# Altium PCB print.PcbDoc
Units mil, origin at the board's own origin, x right, y up, seen from the top; angles counter-clockwise.
Board outline 6000 x 4000 mil, 2 copper layers (Top Layer, Bottom Layer); 191 components, 0 nets, 628 pads, 0 vias.
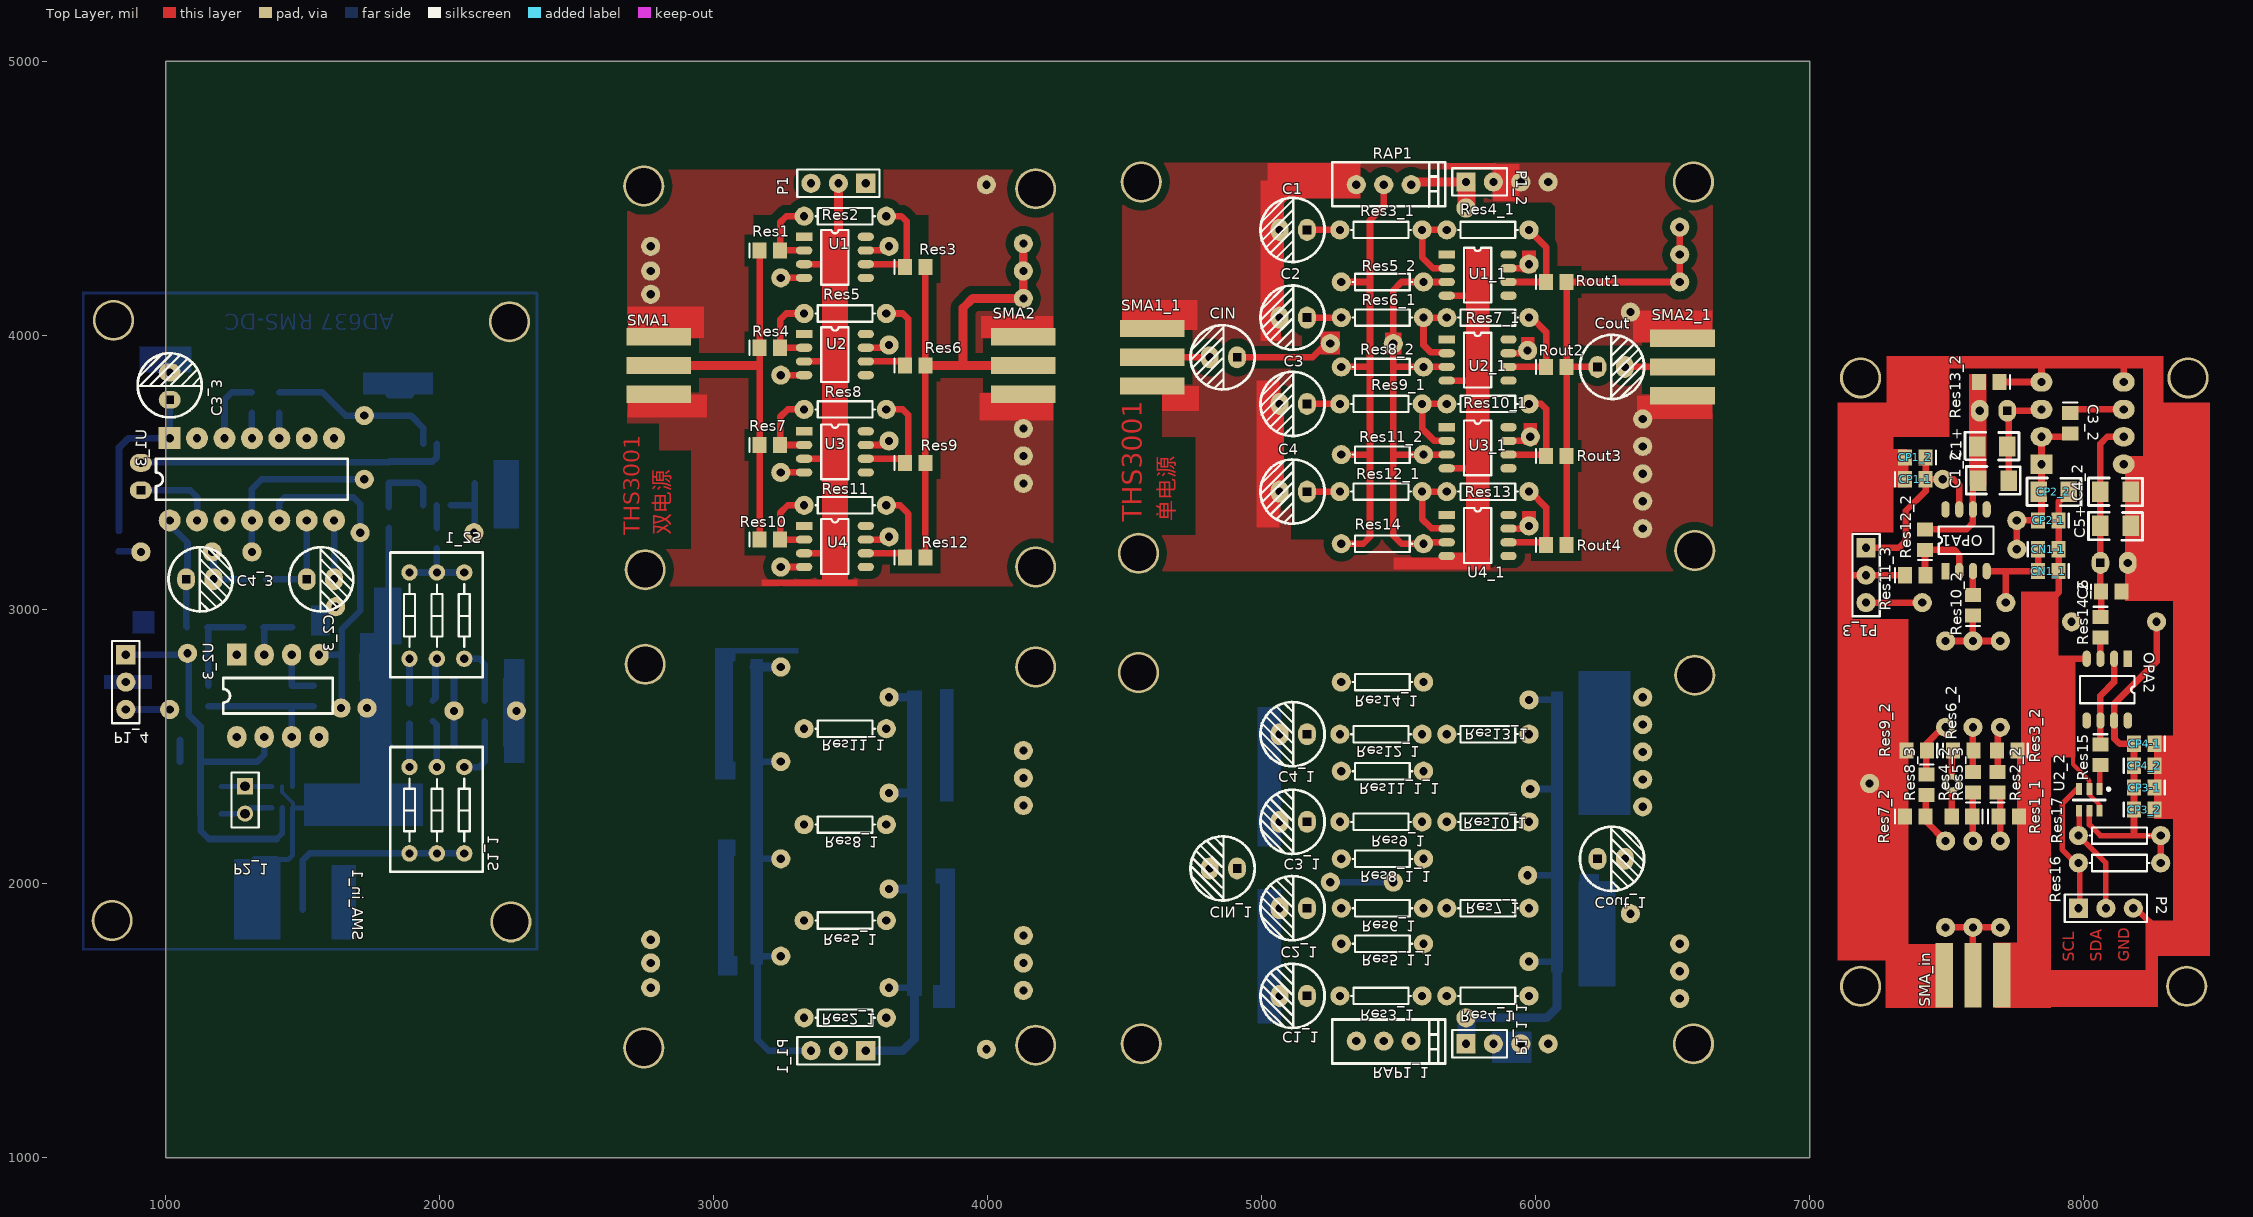
[diagram p0: Top Layer view]
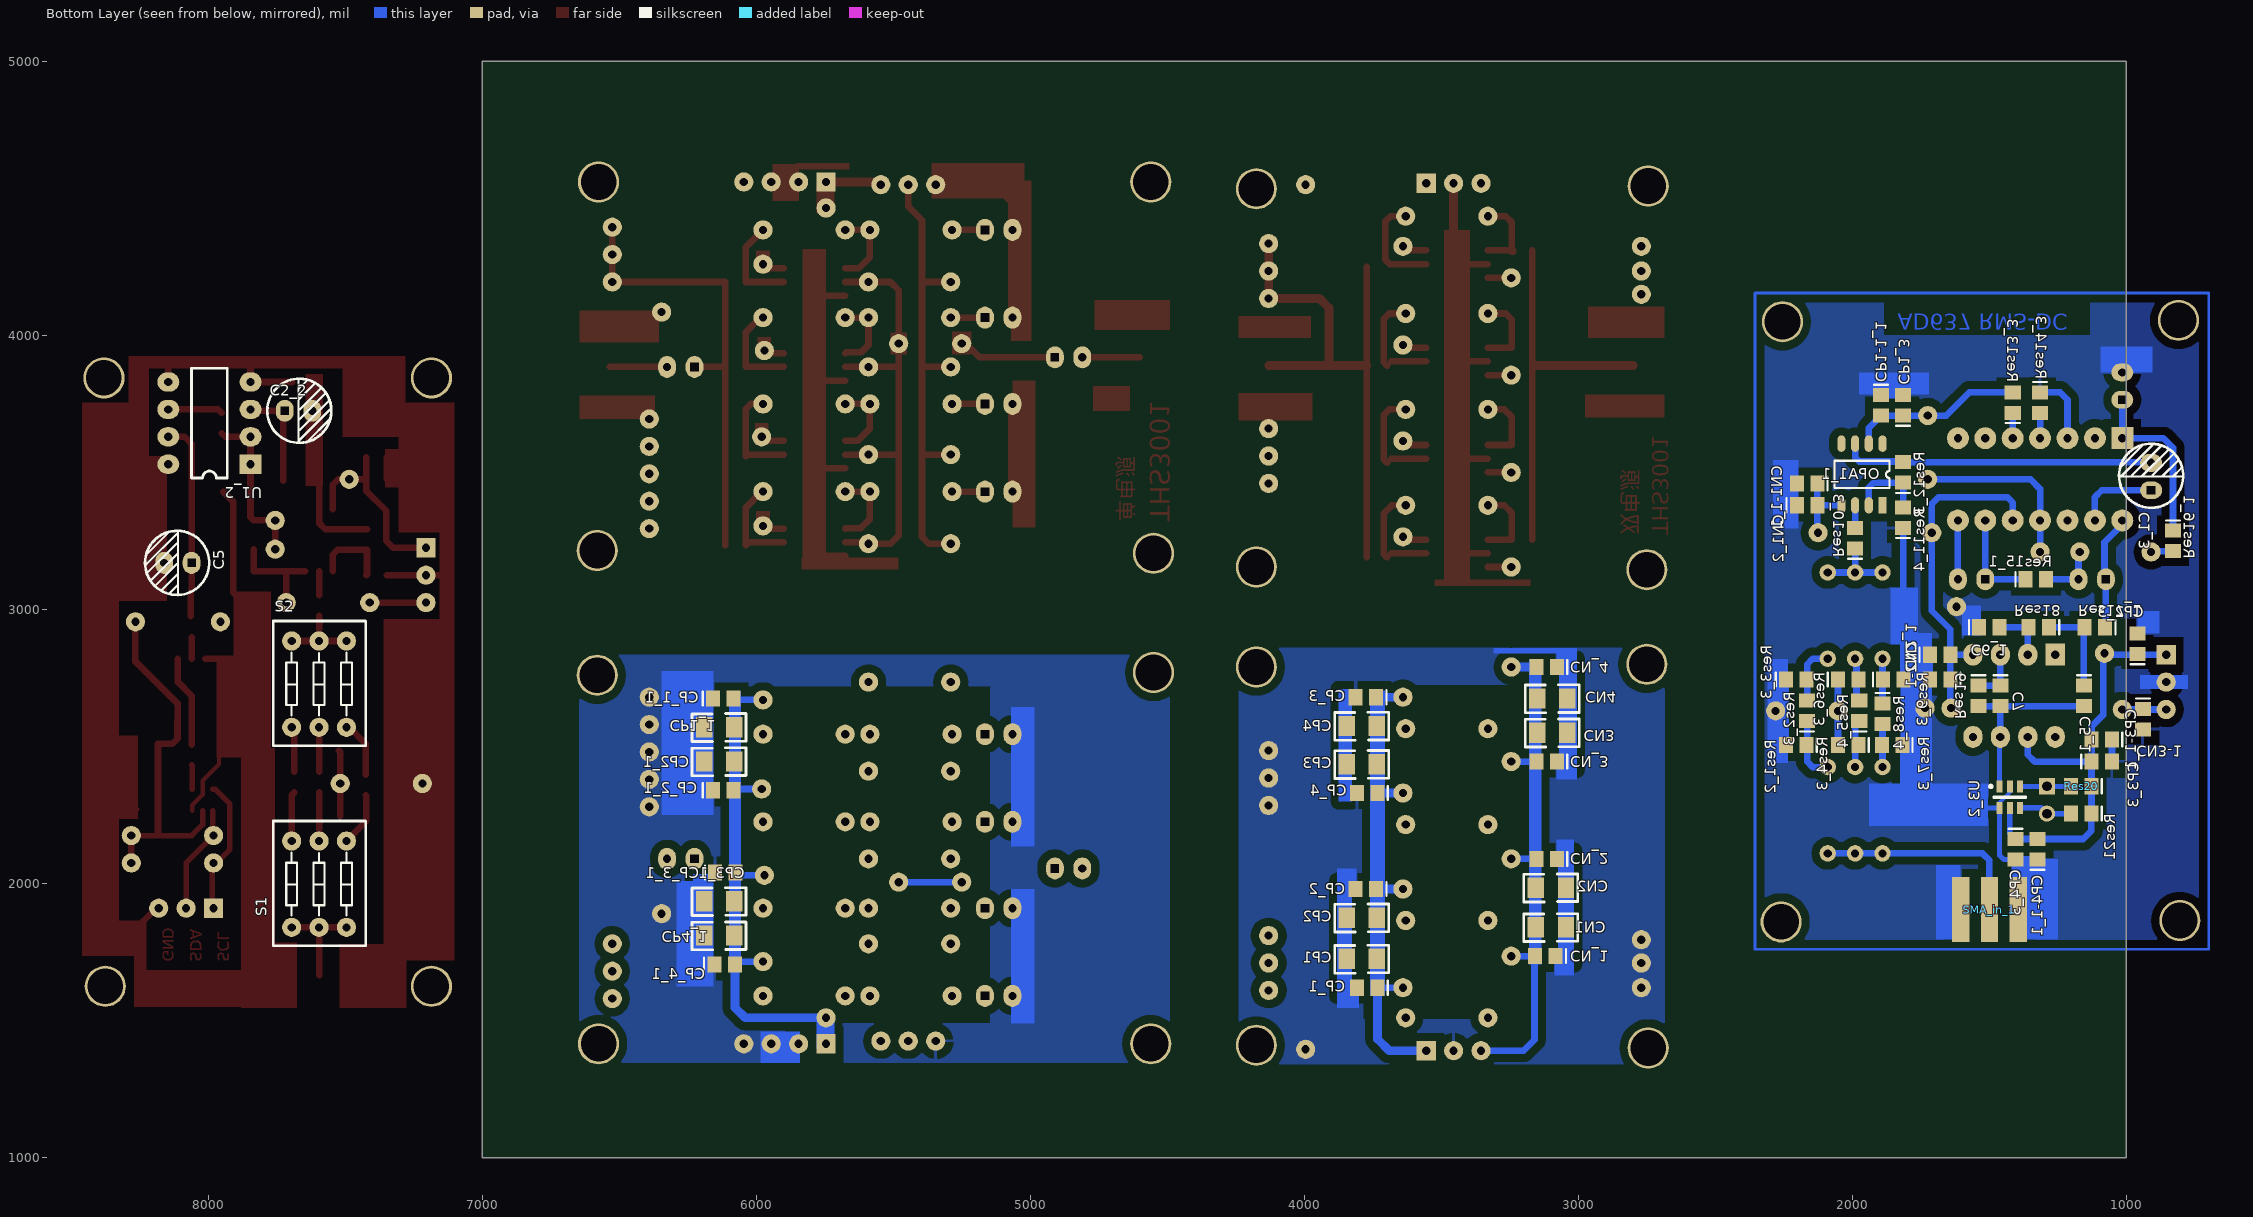
[diagram p1: Bottom Layer view, seen from below]

## Layer stack, top to bottom
Top Layer: signal copper 1.4
Dielectric: dielectric 12.6, FR-4, Dk 4.8
Bottom Layer: signal copper 1.4

## Board outline
1000,1000 7000,1000 7000,5000 1000,5000

## Design rules (kind name [scope] priority, off if disabled: settings)
Clearance [All] p1: gap=10
PolygonConnect [All] p1: connectstyle=Relief reliefconductorwidth=10 reliefentries=4 polygonreliefangle="90 Angle"
RoutingVias [All] p1: holewidth=28 width=50 viastyle="Through Hole" minholewidth=28 minwidth=50 maxholewidth=28 maxwidth=50
SilkscreenOverComponentPads [All] p1: minsilkscreentomaskgap=10
SolderMaskExpansion [All] p1: expansion=4
TestPointUsage [All] p1: valid=0 allowmultiple=FALSE
Testpoint [All] p1: side=15 testpointundercomponent=TRUE minsize=40 maxsize=100 preferedsize=60 minholesize=0 maxholesize=40 preferedholesize=32 testpointgrid=1 style=1023 order=0123456789
Width [All] p1: maxlimit=10 minlimit=10 preferedwidth=10
23 further rules are at their usual default settings.

## Components (designator, comment, footprint, x,y, rotation, side; value= is the part's Value field where it differs from the comment)
C1 "Cap Pol1" CAP1 5165,4385 r180 top
C1+ "Cap2" CAP_BTAN 7720,3595 r180 top
C1_1 "Cap Pol1" CAP1 5165,1590 r180 top (schematic designator C1)
C1_2 "Cap2" CAP_BTAN 7725,3470 r180 top (schematic designator C1)
C1_3 "Cap2" CAP1 910,3435 r90 bottom (schematic designator C1)
C2 "Cap Pol1" CAP1 5165,4065 r180 top
C2_1 "Cap Pol1" CAP1 5165,1910 r180 top (schematic designator C2)
C2_2 "Cap2" CAP1 7720,3725 r180 bottom (schematic designator C2)
C2_3 "Cap2" CAP1 1515,3110 r0 top (schematic designator C2)
C3 "Cap Pol1" CAP1 5165,3750 r180 top
C3_1 "Cap Pol1" CAP1 5165,2225 r180 top (schematic designator C3)
C3_2 "cap" C0805 7950,3680 r270 top (schematic designator C3)
C3_3 "Cap2" CAP1 1015,3765 r90 top (schematic designator C3)
C4 "Cap Pol1" CAP1 5165,3430 r180 top
C4_1 "Cap Pol1" CAP1 5165,2545 r180 top (schematic designator C4)
C4_2 "Cap2" CAP_BTAN 8060,3430 r0 top (schematic designator C4)
C4_3 "Cap2" CAP1 1075,3110 r0 top (schematic designator C4)
C5 "Cap2" CAP1 8060,3170 r0 bottom
C5+ "Cap2" CAP_BTAN 8060,3305 r0 top
C5_1 "cap" C0805 1155,2685 r270 bottom (schematic designator C5)
C6 "cap" C0805 8100,3065 r0 top
C6_1 "cap" C0805 1500,2935 r180 bottom (schematic designator C6)
C7 "cap" C0805 1460,2685 r270 bottom
CIN "Cap Pol1" CAP1 4910,3920 r180 top
CIN_1 "Cap Pol1" CAP1 4910,2055 r180 top (schematic designator CIN)
CN1 "Cap Pol1" CAP_BTAN 3045,1840 r0 bottom
CN1-1 "cap" C0805 7870,3220 r0 top
CN1-1_1 "cap" C0805 2165,3460 r0 bottom (schematic designator CN1-1)
CN1_1 "Cap2" C0805 7870,3140 r180 top (schematic designator CN1)
CN1_2 "Cap Pol1" C0805 2165,3380 r180 bottom (schematic designator CN1)
CN2 "Cap Pol1" CAP_BTAN 3045,1985 r0 bottom
CN2-1 "cap" C0805 1680,2745 r0 bottom
CN2_1 "Cap Pol1" C0805 1680,2835 r180 bottom (schematic designator CN2)
CN3 "Cap Pol1" CAP_BTAN 3040,2550 r0 bottom
CN3-1 "cap" C0805 940,2600 r270 bottom
CN4 "Cap Pol1" CAP_BTAN 3040,2675 r0 bottom
CN_1 "cap" C0805 3120,1735 r0 bottom
CN_2 "cap" C0805 3115,2090 r0 bottom
CN_3 "cap" C0805 3115,2445 r0 bottom
CN_4 "cap" C0805 3115,2790 r0 bottom
Cout "Cap Pol1" CAP1 6225,3885 r0 top
Cout_1 "Cap Pol1" CAP1 6225,2090 r0 top (schematic designator Cout)
CP1 "Cap Pol1" CAP_BTAN 3735,1725 r0 bottom
CP1-1 "cap" C0805 7385,3475 r0 top
CP1-1_1 "cap" C0805 1895,3745 r270 bottom (schematic designator CP1-1)
CP1_1 "Cap Pol1" CAP_BTAN 6080,2570 r0 bottom (schematic designator CP1)
CP1_2 "Cap2" C0805 7385,3555 r180 top (schematic designator CP1)
CP1_3 "Cap Pol1" C0805 1815,3745 r90 bottom (schematic designator CP1)
CP2 "Cap Pol1" CAP_BTAN 3735,1875 r0 bottom
CP2-1 "cap" C0805 7870,3325 r180 top
CP2_1 "Cap Pol1" CAP_BTAN 6080,2445 r0 bottom (schematic designator CP2)
CP2_2 "Cap2" CAP_BTAN 7835,3430 r0 top (schematic designator CP2)
CP2_3 "Cap Pol1" C0805 960,2875 r90 bottom (schematic designator CP2)
CP3 "Cap Pol1" CAP_BTAN 3735,2435 r0 bottom
CP3-1 "cap" C0805 8220,2350 r180 top
CP3-1_1 "cap" C0805 1090,2525 r0 bottom (schematic designator CP3-1)
CP3_1 "Cap Pol1" CAP_BTAN 6080,1935 r0 bottom (schematic designator CP3)
CP3_2 "Cap2" C0805 8220,2270 r0 top (schematic designator CP3)
CP3_3 "Cap Pol1" C0805 1090,2445 r180 bottom (schematic designator CP3)
CP4 "Cap Pol1" CAP_BTAN 3735,2575 r0 bottom
CP4-1 "cap" C0805 8220,2510 r180 top
CP4-1_1 "cap" C0805 1325,2125 r90 bottom (schematic designator CP4-1)
CP4_1 "Cap Pol1" CAP_BTAN 6080,1810 r0 bottom (schematic designator CP4)
CP4_2 "Cap2" C0805 8220,2430 r0 top (schematic designator CP4)
CP4_3 "Cap Pol1" C0805 1405,2125 r270 bottom (schematic designator CP4)
CP_1 "cap" C0805 3770,1620 r0 bottom
CP_1_1 "cap" C0805 6120,2675 r180 bottom (schematic designator CP_1)
CP_2 "cap" C0805 3775,1980 r0 bottom
CP_2_1 "cap" C0805 6120,2340 r180 bottom (schematic designator CP_2)
CP_3 "cap" C0805 3775,2680 r0 bottom
CP_3_1 "cap" C0805 6112.4,2040 r180 bottom (schematic designator CP_3)
CP_4 "cap" C0805 3770,2330 r0 bottom
CP_4_1 "cap" C0805 6115,1705 r180 bottom (schematic designator CP_4)
OPA1 "OPA690" SOIC-8D#1 7495,3140 r90 top
OPA1_1 "OPA690" SOIC-8D#2 1890,3380 r90 bottom (schematic designator OPA1)
OPA2 "OPA333" SOIC-8D#1 8160,2820 r270 top
P1 "Header 3" HDR1X3 3555,4555 r180 top
P1_1 "Header 3" HDR1X3 3555,1390 r180 top (schematic designator P1)
P1_1_1 "Header 2" HDR1X2#1 5745,1415 r0 top (schematic designator P1)
P1_2 "Header 2" HDR1X2#1 5745,4560 r0 top (schematic designator P1)
P1_3 "Header 3" HDR1X3 7205,3225 r270 top (schematic designator P1)
P1_4 "Header 3" HDR1X3 855,2835 r270 top (schematic designator P1)
P2 "Header 3" HDR1X3 7980,1910 r0 top
P2_1 "Header 2" HDR1X2#2 1290,2355 r270 top (schematic designator P2)
RAP1 "RP1" dianweiqi#1 5545,4550 r270 top (schematic designator *)
RAP1_1 "RP1" dianweiqi#2 5545,1425 r90 top (schematic designator *)
Res1 "Res" C0805 3205,4310 r0 top
Res1_1 "Res" C0805 7725,2245 r0 top (schematic designator Res1)
Res1_2 "Res" C0805 2205,2505 r0 bottom (schematic designator Res1)
Res2 "Res" R-AXIAL0.3 3330,4435 r0 top
Res2_1 "Res" R-AXIAL0.3 3330,1510 r0 top (schematic designator Res2)
Res2_2 "Res" C0805 7685,2370 r90 top (schematic designator Res2)
Res2_3 "Res" C0805 2165,2630 r90 bottom (schematic designator Res2)
Res3 "Res" C0805 3735,4250 r0 top
Res3_1 "Res" R-AXIAL0.3 5585,4385 r180 top (schematic designator Res3)
Res3_1 "Res" R-AXIAL0.3 5585,1590 r180 top (schematic designator Res3)
Res3_2 "Res" C0805 7720,2485 r180 top (schematic designator Res3)
Res3_3 "Res" C0805 2205,2745 r180 bottom (schematic designator Res3)
Res4 "Res" C0805 3205,3955 r0 top
Res4_1 "Res" AXIAL-0.3 5825,4385 r180 top (schematic designator Res4)
Res4_1 "Res" AXIAL-0.3 5825,1590 r180 top (schematic designator Res4)
Res4_2 "Res" C0805 7555,2245 r180 top (schematic designator Res4)
Res4_3 "Res" C0805 2015,2505 r0 bottom (schematic designator Res4)
Res5 "Res" R-AXIAL0.3 3330,4080 r0 top
Res5_1 "Res" R-AXIAL0.3 3330,1865 r0 top (schematic designator Res5)
Res5_1_1 "Res" R-AXIAL0.3 5290,1780 r0 top (schematic designator Res5)
Res5_2 "Res" R-AXIAL0.3 5290,4195 r0 top (schematic designator Res5)
Res5_3 "Res" C0805 7595,2370 r90 top (schematic designator Res5)
Res5_4 "Res" C0805 1975,2630 r90 bottom (schematic designator Res5)
Res6 "Res" C0805 3735,3890 r0 top
Res6_1 "Res" R-AXIAL0.3 5290,4065 r0 top (schematic designator Res6)
Res6_1 "Res" R-AXIAL0.3 5290,1910 r0 top (schematic designator Res6)
Res6_2 "Res" C0805 7560,2485 r0 top (schematic designator Res6)
Res6_3 "Res" C0805 2015,2745 r180 bottom (schematic designator Res6)
Res7 "Res" C0805 3205,3600 r0 top
Res7_1 "Res" AXIAL-0.3 5825,4065 r0 top (schematic designator Res7)
Res7_1 "Res" AXIAL-0.3 5825,1910 r0 top (schematic designator Res7)
Res7_2 "Res" C0805 7385,2245 r0 top (schematic designator Res7)
Res7_3 "Res" C0805 1855,2505 r0 bottom (schematic designator Res7)
Res8 "Res" R-AXIAL0.3 3330,3730 r0 top
Res8_1 "Res" R-AXIAL0.3 3330,2215 r0 top (schematic designator Res8)
Res8_1_1 "Res" R-AXIAL0.3 5290,2090 r0 top (schematic designator Res8)
Res8_2 "Res" R-AXIAL0.3 5290,3885 r0 top (schematic designator Res8)
Res8_3 "Res" C0805 7425,2360 r270 top (schematic designator Res8)
Res8_4 "Res" C0805 1890,2620 r270 bottom (schematic designator Res8)
Res9 "Res" C0805 3735,3535 r0 top
Res9_1 "Res" R-AXIAL0.3 5285,3750 r0 top (schematic designator Res9)
Res9_1 "Res" R-AXIAL0.3 5285,2225 r0 top (schematic designator Res9)
Res9_2 "Res" C0805 7390,2485 r180 top (schematic designator Res9)
Res9_3 "Res" C0805 1850,2745 r180 bottom (schematic designator Res9)
Res10 "Res" C0805 3205,3255 r0 top
Res10_1 "Res" AXIAL-0.3 5825,3750 r0 top (schematic designator Res10)
Res10_1 "Res" AXIAL-0.3 5825,2225 r0 top (schematic designator Res10)
Res10_2 "Res" C0805 7595,3015 r90 top (schematic designator Res10)
Res10_3 "Res" C0805 1990,3260 r90 bottom (schematic designator Res10)
Res11 "Res" R-AXIAL0.3 3330,3380 r0 top
Res11_1 "Res" R-AXIAL0.3 3330,2565 r0 top (schematic designator Res11)
Res11_1_1 "Res" R-AXIAL0.3 5290,2410 r0 top (schematic designator Res11)
Res11_2 "Res" R-AXIAL0.3 5290,3565 r0 top (schematic designator Res11)
Res11_3 "Res" C0805 7385,3125 r0 top (schematic designator Res11)
Res11_4 "Res" C0805 1815,3335 r90 bottom (schematic designator Res11)
Res12 "Res" C0805 3735,3190 r0 top
Res12_1 "Res" R-AXIAL0.3 5285,3430 r0 top (schematic designator Res12)
Res12_1 "Res" R-AXIAL0.3 5285,2545 r0 top (schematic designator Res12)
Res12_2 "Res" C0805 7420,3255 r90 top (schematic designator Res12)
Res12_3 "Res" C0805 1815,3500 r90 bottom (schematic designator Res12)
Res13 "Res" AXIAL-0.3 5825,3430 r0 top
Res13_1 "Res" AXIAL-0.3 5825,2545 r0 top (schematic designator Res13)
Res13_2 "Res" C0805 7655,3830 r180 top (schematic designator Res13)
Res13_3 "Res" C0805 1415,3755 r90 bottom (schematic designator Res13)
Res14 "Res" R-AXIAL0.3 5290,3240 r0 top
Res14_1 "Res" R-AXIAL0.3 5290,2735 r0 top (schematic designator Res14)
Res14_2 "Res" C0805 8060,2935 r270 top (schematic designator Res14)
Res14_3 "Res" C0805 1315,3755 r270 bottom (schematic designator Res14)
Res15 "Res" C0805 8060,2470 r270 top
Res15_1 "Res" C0805 1330,3110 r180 bottom (schematic designator Res15)
Res16 "Res" AXIAL-0.3 8130,2075 r180 top
Res16_1 "Res" C0805 830,3250 r270 bottom (schematic designator Res16)
Res17 "Res" AXIAL-0.3 8130,2175 r180 top
Res17_1 "Res" C0805 1115,2935 r0 bottom (schematic designator Res17)
Res18 "Res" C0805 1320,2935 r0 bottom
Res19 "Res" C0805 1540,2685 r270 bottom
Res20 "Res" C0805 1165,2355 r0 bottom
Res21 "Res" C0805 1165,2255 r0 bottom
Rout1 "Res" C0805 6075,4195 r0 top
Rout2 "Res" C0805 6075,3885 r0 top
Rout3 "Res" C0805 6075,3560 r0 top
Rout4 "Res" C0805 6075,3235 r0 top
S1 "SW_3WAY" SW_3WAY#1 7695,1840 r90 bottom
S1_1 "SW_3WAY" SW_3WAY#2 2090,2110 r90 top (schematic designator S1)
S2 "SW_3WAY" SW_3WAY#1 7695,2570 r90 bottom
S2_1 "SW_3WAY" SW_3WAY#2 2090,2820 r90 top (schematic designator S2)
SMA1 "SMA-xie" sma-xie#1 2700,3975 r0 top
SMA1_1 "SMA-xie" sma-xie#1 4500,4005 r0 top (schematic designator SMA1)
SMA2 "SMA-xie" sma-xie#1 4030,3975 r0 top
SMA2_1 "SMA-xie" sma-xie#1 6435,3970 r0 top (schematic designator SMA2)
SMA_in "SMA-xie" sma-xie#1 7510,1565 r90 top
SMA_in_1 "SMA-xie" sma-xie#2 1585,1805 r90 top (schematic designator SMA_in)
U1 "THS3091" SOIC-8D#1 3330,4360 r0 top
U1_1 "THS3091" SOIC-8D#1 5675,4295 r0 top (schematic designator U1)
U1_2 "AD8361" DIP8#1 7845,3530 r0 bottom (schematic designator U1)
U1_3 "AD637(DIP)" DIP14 1015,3625 r270 top (schematic designator U1)
U2 "THS3091" SOIC-8D#1 3330,4005 r0 top
U2_1 "THS3091" SOIC-8D#1 5675,3985 r0 top (schematic designator U2)
U2_2 "ADS1110" SOT-6DDC#1 8020,2305 r270 top (schematic designator U2)
U2_3 "OPA604" DIP8#2 1260,2835 r270 top (schematic designator U2)
U3 "THS3091" SOIC-8D#1 3330,3650 r0 top
U3_1 "THS3091" SOIC-8D#1 5675,3665 r0 top (schematic designator U3)
U3_2 "ADS1110" SOT-6DDC#2 1425,2315 r270 bottom (schematic designator U3)
U4 "THS3091" SOIC-8D#1 3330,3305 r0 top
U4_1 "THS3091" SOIC-8D#1 5675,3345 r0 top (schematic designator U4)

## Footprints (in the part's own frame and the unit in brackets; to place one, negate y for a bottom-side part, rotate by r counter-clockwise, add the part's x,y. Pads: shape width x height; smd on the part's side, far side on the other; paste and mask are expansions set on the pad)
AXIAL-0.3 [mil] "Resistor; 2 Leads"
  round 70 hole 30: 1(-150,0) 2(150,0)
  silkscreen extent -109,-30 109,30
C0805 [mm] "Chip Capacitor; Body 2.0 x 1.2 mm (LxW typ)"
  rect 1.3x1.5 smd: 1(-0.95,0) 2(0.95,0)
  silkscreen extent -1.9,-0.65 -1.9,0.65
CAP1 [mil] "占地1*2的电容或器件均可以用它"
  oval 65x80 hole 30 square: 1(0,0)
  oval 65x80 hole 30: 2(100,0)
  silkscreen extent -64,-117 170,117
CAP_BTAN [mil]
  rect 60x74 smd: 1(0,0) 2(110,0)
  silkscreen extent -43,-52 154,50
dianweiqi#1 [mil]
  round 70 hole 30: 1(0,0) 2(0,-100) 3(0,-200)
  silkscreen extent -82,-288 80,124
dianweiqi#2 [mil]
  round 70 hole 30: 1(0,0) 2(0,100) 3(0,200)
  silkscreen extent -82,-124 80,288
DIP8#1 [mil]
  rect 80x70 hole 30: 1(0,0)
  oval 80x70 hole 30: 2(0,-100) 3(0,-200) 4(0,-300) 5(300,-300) 6(300,-200) 7(300,-100) 8(300,0)
  silkscreen extent 85,-350 215,50
DIP8#2 [mil]
  rect 80x70 hole 30: 1(0,0)
  oval 80x70 hole 30: 2(0,100) 3(0,200) 4(0,300) 5(300,300) 6(300,200) 7(300,100) 8(300,0)
  silkscreen extent 85,-50 215,350
DIP14 [mil]
  rect 80x80 hole 30: 1(0,0)
  round 80 hole 30: 2(0,100) 3(0,200) 4(0,300) 5(0,400) 6(0,500) 7(0,600) 8(300,600) 9(300,500) 10(300,400) 11(300,300) 12(300,200) 13(300,100) 14(300,0)
  silkscreen extent 75,-50 225,650
HDR1X2#1 [mil] "Connector; Header; 2 Position"
  rect 70x70 hole 30: 1(0,0)
  round 70 hole 30: 2(100,0)
  silkscreen extent -50,-50 150,50
HDR1X2#2 [mil] "Connector; Header; 2 Position"
  rect 59.06x59.06 hole 35.43: 1(0,0)
  round 59.06 hole 35.43: 2(100,0)
  silkscreen extent -50,-50 150,50
HDR1X3 [mil] "Connector; Header; 3 Position"
  rect 70x70 hole 30: 1(0,0)
  round 70 hole 30: 2(100,0) 3(200,0)
  silkscreen extent -50,-50 250,50
R-AXIAL0.3 [mil]
  round 70 hole 30: 1(0,0) 2(300,0)
  silkscreen extent 41,-30 259,30
sma-xie#1 [mm] "SMA接头外螺内孔，斜四角"
  rect 6x1.6 smd: 1(2.54,0.508) 2(2.54,-2.159) 3(2.54,-4.826)
sma-xie#2 [mm] "SMA接头外螺内孔，斜四角"
  rect 6x1.6 smd far side: 1(2.54,-0.508) 2(2.54,2.159) 3(2.54,4.826)
SOIC-8D#1 [mm] "封装代码为D"
  rect 1.52x0.76 smd: 1(0,0)
  oval 1.52x0.76 smd: 2(0,-1.27) 3(0,-2.54) 4(0,-3.81) 5(5.72,-3.81) 6(5.72,-2.54) 7(5.72,-1.27) 8(5.72,0)
  silkscreen extent 1.59,-4.44 4.13,0.64
SOIC-8D#2 [mm] "封装代码为D"
  rect 1.52x0.76 smd: 1(0,0)
  oval 1.52x0.76 smd: 2(0,1.27) 3(0,2.54) 4(0,3.81) 5(5.72,3.81) 6(5.72,2.54) 7(5.72,1.27) 8(5.72,0)
  silkscreen extent 1.59,-0.64 4.13,4.44
SOT-6DDC#1 [mm] "SOT23, 6-Leads, Body 3.0x2.6mm (max), Pitch 0.95mm, IPC Medium Density"
  rect 1.1x0.55 smd: 1(-1,0.95) 2(-1,0) 3(-1,-0.95) 4(1,-0.95) 5(1,0) 6(1,0.95)
  silkscreen extent -1.12,-1.5 0.05,1.9, body extent -0.87,-1.52 0.87,1.53, height 1.1
SOT-6DDC#2 [mm] "SOT23, 6-Leads, Body 3.0x2.6mm (max), Pitch 0.95mm, IPC Medium Density"
  rect 1.1x0.55 smd: 1(-1,-0.95) 2(-1,0) 3(-1,0.95) 4(1,0.95) 5(1,0) 6(1,-0.95)
  silkscreen extent -1.12,-1.9 0.05,1.5, body extent -0.87,-1.53 0.87,1.52, height 1.1
SW_3WAY#1 [mil]
  round 70 hole 30: 1(0,0) 2(0,-100) 3(0,-200) 4(315,-200) 5(315,-100) 6(315,0)
  silkscreen extent -67,-270 388,67
SW_3WAY#2 [mil]
  round 60 hole 30: 1(0,0) 2(0,100) 3(0,200) 4(315,200) 5(315,100) 6(315,0)
  silkscreen extent -67,-67 388,270

## Part data
C1 C1_1 C2 C2_1 C3 C3_1 C4 C4_1 CIN CIN_1 CN1 CN1_2 CN2 CN2_1 CN3 CN4 Cout Cout_1 CP1 CP1_1 CP1_3 CP2 CP2_1 CP2_3 CP3 CP3_1 CP3_3 CP4 CP4_1 CP4_3: "Polarized Capacitor (Radial)"
C1+ C1_2 C1_3 C2_2 C2_3 C3_3 C4_2 C4_3 C5 C5+ CN1_1 CP1_2 CP2_2 CP3_2 CP4_2: "Capacitor"
C3_2 C5_1 C6 C6_1 C7 CN1-1 CN1-1_1 CN2-1 CN3-1 CN_1 CN_2 CN_3 CN_4 CP1-1 CP1-1_1 CP2-1 CP3-1 CP3-1_1 CP4-1 CP4-1_1 CP_1 CP_1_1 CP_2 CP_2_1 CP_3 CP_3_1 CP_4 CP_4_1: "贴片电容"
OPA1 OPA1_1 OPA2: library part "OPA690 ID", "第8引脚为dis，什么也不要接"
P1 P1_1 P1_3 P1_4 P2: "Header, 3-Pin"
P1_1_1 P1_2 P2_1: "Header, 2-Pin"
Res1 Res1_1 Res1_2 Res2 Res2_1 Res2_2 Res2_3 Res3 Res3_1 Res3_1 Res3_2 Res3_3 Res4 Res4_1 Res4_1 Res4_2 Res4_3 Res5 Res5_1 Res5_1_1 Res5_2 Res5_3 Res5_4 Res6 Res6_1 Res6_1 Res6_2 Res6_3 Res7 Res7_1 Res7_1 Res7_2 Res7_3 Res8 Res8_1 Res8_1_1 Res8_2 Res8_3 Res8_4 Res9 Res9_1 Res9_1 Res9_2 Res9_3 Res10 Res10_1 Res10_1 Res10_2 Res10_3 Res11 Res11_1 Res11_1_1 Res11_2 Res11_3 Res11_4 Res12 Res12_1 Res12_1 Res12_2 Res12_3 Res13 Res13_1 Res13_2 Res13_3 Res14 Res14_1 Res14_2 Res14_3 Res15 Res15_1 Res16 Res16_1 Res17 Res17_1 Res18 Res19 Res20 Res21 Rout1 Rout2 Rout3 Rout4: "适用于0805的贴片元件，包括磁珠"
SMA1 SMA1_1 SMA2 SMA2_1 SMA_in SMA_in_1: "外螺内孔，斜角，或直四角斜着放置"
U1 U1_1 U2 U2_1 U3 U3_1 U4 U4_1: "单路高压低失真电流反馈 运放 ,通常申请DDA，即下方带有热焊盘的，有利于散热"
U2_3: library part OPA656, "宽带单位增益稳定FET输入运算放大器"

## Free pads (board coordinates)
  round 70 hole 30: 0(1710,3280) 0(3640,1620) 0(3640,4325) 0(7715,3025) 1(2125,3280) 1(3640,1980) 1(3640,3965) 1(5970,2030) 1(5970,3945) 1(7410,3025) 2(910,3210) 2(3640,2330) 2(3640,3615) 2(5975,1715) 2(5975,4260) 2(7485,3475) 3(1170,3210) 3(3640,2680) 3(3640,3265) 3(5980,2345) 3(5980,3630) 3(7755,3325) 4(1725,3475) 4(3245,1735) 4(3245,4210) 4(5975,2670) 4(5975,3305) 4(7755,3220) 5(1725,3707.6) 5(3245,2090) 5(3245,3855) 5(5250,2005) 5(5250,3970) 5(7955,2955) 6(1080,2840) 6(3245,2445) 6(3245,3500) 6(5480,2005) 6(5480,3970) 6(8265,2955) 7(1315,3210) 7(3245,2790) 7(3245,3155) 8(1015,2635) 8(5745,1510) 8(5745,4465) 8(7517.6,2365) 9(1640,2640) 9(4130,1810) 9(4130,4135) 9(7218,2365) 10(4130,1710) 10(4130,4235) 11(1620,3010) 11(4130,1610) 11(4130,4335) 12(1735,2640) 12(4130,2285) 12(4130,3660) 13(2052.4,2630) 13(4130,2385) 13(4130,3560) 14(2280,2630) 14(4130,2485) 14(4130,3460) 14(6525,1780) 14(6525,4195) 15(2770,1620) 15(2770,4325) 15(6525,1680) 15(6525,4295) 16(2770,1710) 16(2770,4235) 16(6525,1580) 16(6525,4395) 17(2770,1795) 17(2770,4150) 17(6390,2280) 17(6390,3695) 18(3995,1395) 18(3995,4550) 18(6390,2380) 18(6390,3595) 19(6390,2480) 19(6390,3495) 20(6390,2580) 20(6390,3395) 21(6390,2680) 21(6390,3295) 22(6345,1890) 22(6345,4085) 23(5945,1415) 23(5945,4560) 24(6045,1415) 24(6045,4560)
  round 150 hole 130: 7(4550,2770) 7(4550,3205) 7(4560,1415) 7(4560,4560) 7(6575,1415) 7(6575,4560) 7(6580,2760) 7(6580,3215) 7(7185,1625) 7(7185,3845) 7(8375,1625) 7(8380,3845) 8(2745,1400) 8(2745,4545) 8(2750,2800) 8(2750,3145) 8(4175,1410) 8(4175,2790) 8(4175,3155) 8(4175,4535) 10(805,1865) 10(810,4055) 10(2255,4050) 10(2260,1860)

## Nets (pads, with @x,y where several pads share a name; then routed paths per layer and width w, separated by ;. In a path a pad name is that pad's centre, name@x,y a point inside that pad or via, vN(x,y) a via of type N, cw(c..) or ccw(c..) an arc to the next point about the centre after c; other vN are vias at no path point)
pads on no net: C1+.1 C1+.2 C1.1 C1.2 C1_1.1 C1_1.2 C1_2.1 C1_2.2 C1_3.1 C1_3.2 C2.1 C2.2 C2_1.1 C2_1.2 C2_2.1 C2_2.2 C2_3.1 C2_3.2 C3.1 C3.2 C3_1.1 C3_1.2 C3_2.1 C3_2.2 C3_3.1 C3_3.2 C4.1 C4.2 C4_1.1 C4_1.2 C4_2.1 C4_2.2 C4_3.1 C4_3.2 C5+.1 C5+.2 C5.1 C5.2 C5_1.1 C5_1.2 C6.1 C6.2 C6_1.1 C6_1.2 C7.1 C7.2 CIN.1 CIN.2 CIN_1.1 CIN_1.2 CN1-1.1 CN1-1.2 CN1-1_1.1 CN1-1_1.2 CN1.1 CN1.2 CN1_1.1 CN1_1.2 CN1_2.1 CN1_2.2 CN2-1.1 CN2-1.2 CN2.1 CN2.2 CN2_1.1 CN2_1.2 CN3-1.1 CN3-1.2 CN3.1 CN3.2 CN4.1 CN4.2 CN_1.1 CN_1.2 CN_2.1 CN_2.2 CN_3.1 CN_3.2 CN_4.1 CN_4.2 Cout.1 Cout.2 Cout_1.1 Cout_1.2 CP1-1.1 CP1-1.2 CP1-1_1.1 CP1-1_1.2 CP1.1 CP1.2 CP1_1.1 CP1_1.2 CP1_2.1 CP1_2.2 CP1_3.1 CP1_3.2 CP2-1.1 CP2-1.2 CP2.1 CP2.2 CP2_1.1 CP2_1.2 CP2_2.1 CP2_2.2 CP2_3.1 CP2_3.2 CP3-1.1 CP3-1.2 CP3-1_1.1 CP3-1_1.2 CP3.1 CP3.2 CP3_1.1 CP3_1.2 CP3_2.1 CP3_2.2 CP3_3.1 CP3_3.2 CP4-1.1 CP4-1.2 CP4-1_1.1 CP4-1_1.2 CP4.1 CP4.2 CP4_1.1 CP4_1.2 CP4_2.1 CP4_2.2 CP4_3.1 CP4_3.2 CP_1.1 CP_1.2 CP_1_1.1 CP_1_1.2 CP_2.1 CP_2.2 CP_2_1.1 CP_2_1.2 CP_3.1 CP_3.2 CP_3_1.1 CP_3_1.2 CP_4.1 CP_4.2 CP_4_1.1 CP_4_1.2 OPA1.1 OPA1.2 OPA1.3 OPA1.4 OPA1.5 OPA1.6 OPA1.7 OPA1.8 OPA1_1.1 OPA1_1.2 OPA1_1.3 OPA1_1.4 OPA1_1.5 OPA1_1.6 OPA1_1.7 OPA1_1.8 OPA2.1 OPA2.2 OPA2.3 OPA2.4 OPA2.5 OPA2.6 OPA2.7 OPA2.8 P1.1 P1.2 P1.3 P1_1.1 P1_1.2 P1_1.3 P1_1_1.1 P1_1_1.2 P1_2.1 P1_2.2 P1_3.1 P1_3.2 P1_3.3 P1_4.1 P1_4.2 P1_4.3 P2.1 P2.2 P2.3 P2_1.1 P2_1.2 RAP1.1 RAP1.2 RAP1.3 RAP1_1.1 RAP1_1.2 RAP1_1.3 Res1.1 Res1.2 Res1_1.1 Res1_1.2 Res1_2.1 Res1_2.2 Res2.1 Res2.2 Res2_1.1 Res2_1.2 Res2_2.1 Res2_2.2 Res2_3.1 Res2_3.2 Res3.1 Res3.2 Res3_1.1 Res3_1.2 Res3_2.1 Res3_2.2 Res3_3.1 Res3_3.2 Res4.1 Res4.2 Res4_1.1 Res4_1.2 Res4_2.1 Res4_2.2 Res4_3.1 Res4_3.2 Res5.1 Res5.2 Res5_1.1 Res5_1.2 Res5_1_1.1 Res5_1_1.2 Res5_2.1 Res5_2.2 Res5_3.1 Res5_3.2 Res5_4.1 Res5_4.2 Res6.1 Res6.2 Res6_1.1 Res6_1.2 Res6_2.1 Res6_2.2 Res6_3.1 Res6_3.2 Res7.1 Res7.2 Res7_1.1 Res7_1.2 Res7_2.1 Res7_2.2 Res7_3.1 Res7_3.2 Res8.1 Res8.2 Res8_1.1 Res8_1.2 Res8_1_1.1 Res8_1_1.2 Res8_2.1 Res8_2.2 Res8_3.1 Res8_3.2 Res8_4.1 Res8_4.2 Res9.1 Res9.2 Res9_1.1 Res9_1.2 Res9_2.1 Res9_2.2 Res9_3.1 Res9_3.2 Res10.1 Res10.2 Res10_1.1 Res10_1.2 Res10_2.1 Res10_2.2 Res10_3.1 Res10_3.2 Res11.1 Res11.2 Res11_1.1 Res11_1.2 Res11_1_1.1 Res11_1_1.2 Res11_2.1 Res11_2.2 Res11_3.1 Res11_3.2 Res11_4.1 Res11_4.2 Res12.1 Res12.2 Res12_1.1 Res12_1.2 Res12_2.1 Res12_2.2 Res12_3.1 Res12_3.2 Res13.1 Res13.2 Res13_1.1 Res13_1.2 Res13_2.1 Res13_2.2 Res13_3.1 Res13_3.2 Res14.1 Res14.2 Res14_1.1 Res14_1.2 Res14_2.1 Res14_2.2 Res14_3.1 Res14_3.2 Res15.1 Res15.2 Res15_1.1 Res15_1.2 Res16.1 Res16.2 Res16_1.1 Res16_1.2 Res17.1 Res17.2 Res17_1.1 Res17_1.2 Res18.1 Res18.2 Res19.1 Res19.2 Res20.1 Res20.2 Res21.1 Res21.2 Rout1.1 Rout1.2 Rout2.1 Rout2.2 Rout3.1 Rout3.2 Rout4.1 Rout4.2 S1.1 S1.2 S1.3 S1.4 S1.5 S1.6 S1_1.1 S1_1.2 S1_1.3 S1_1.4 S1_1.5 S1_1.6 S2.1 S2.2 S2.3 S2.4 S2.5 S2.6 S2_1.1 S2_1.2 S2_1.3 S2_1.4 S2_1.5 S2_1.6 SMA1.1 SMA1.2 SMA1.3 SMA1_1.1 SMA1_1.2 SMA1_1.3 SMA2.1 SMA2.2 SMA2.3 SMA2_1.1 SMA2_1.2 SMA2_1.3 SMA_in.1 SMA_in.2 SMA_in.3 SMA_in_1.1 SMA_in_1.2 SMA_in_1.3 U1.1 U1.2 U1.3 U1.4 U1.5 U1.6 U1.7 U1.8 U1_1.1 U1_1.2 U1_1.3 U1_1.4 U1_1.5 U1_1.6 U1_1.7 U1_1.8 U1_2.1 U1_2.2 U1_2.3 U1_2.4 U1_2.5 U1_2.6 U1_2.7 U1_2.8 U1_3.1 U1_3.2 U1_3.3 U1_3.4 U1_3.5 U1_3.6 U1_3.7 U1_3.8 U1_3.9 U1_3.10 U1_3.11 U1_3.12 U1_3.13 U1_3.14 U2.1 U2.2 U2.3 U2.4 U2.5 U2.6 U2.7 U2.8 U2_1.1 U2_1.2 U2_1.3 U2_1.4 U2_1.5 U2_1.6 U2_1.7 U2_1.8 U2_2.1 U2_2.2 U2_2.3 U2_2.4 U2_2.5 U2_2.6 U2_3.1 U2_3.2 U2_3.3 U2_3.4 U2_3.5 U2_3.6 U2_3.7 U2_3.8 U3.1 U3.2 U3.3 U3.4 U3.5 U3.6 U3.7 U3.8 U3_1.1 U3_1.2 U3_1.3 U3_1.4 U3_1.5 U3_1.6 U3_1.7 U3_1.8 U3_2.1 U3_2.2 U3_2.3 U3_2.4 U3_2.5 U3_2.6 U4.1 U4.2 U4.3 U4.4 U4.5 U4.6 U4.7 U4.8 U4_1.1 U4_1.2 U4_1.3 U4_1.4 U4_1.5 U4_1.6 U4_1.7 U4_1.8
copper on no net: | length 55484
  Top Layer w16: 7960,2620 7960,2435 8020,2375 8020,2344.37 8020,2323.57 8057.4,2286.16 8057.4,2265.63
  Top Layer w20: 7980,1910 7985,1915 7985,2060 7920,2125 7920,2290 7974.37,2344.37 7982.6,2344.37 ; 7982.6,2265.63 7982.6,2177.6 7980,2175 8080,2075 8080,1910 ; 8020,2265.63 8020,2215 8060,2175 8185,2175 8280,2175 ; 8057.4,2344.37 8057.4,2430 8060,2432.6
  Top Layer w24: 3167.6,3255 3167.6,3600 3167.6,3955 3167.6,4310 ; 3242.4,4310 3330,4310 ; 3242.66,4305.28 3237.4,4305 3239.27,4310.98 3242.4,4320.98 3242.4,4412.4 3265,4435 3330,4435 ; 3245,3155 3330,3155 ; 3245,3500 3330,3500 ; 3245,3855 3330,3855 ; 3245,4210 3330,4210 ; 3315,4435 3330,4435 ; 3316.42,4435 3330,4435 ; 3325,4440 cw(c3325,4435) 3330,4435 ; 3330,3205 3420,3205 ; 3330,3255 3242.4,3255 3242.4,3352.4 3270,3380 3330,3380 ; 3330,3550 3420,3550 ; 3330,3600 3242.4,3600 3242.4,3702.4 3270,3730 3330,3730 ; 3330,3905 3440,3905 ; 3330,3955 3242.4,3955 3242.4,4057.4 3265,4080 3330,4080 ; 3330,4260 3440,4260 ; 3555.2,3205 3682.6,3205 ; 3555.2,3255 3630,3255 3640,3265 ; 3555.2,3550 3682.6,3550 ; 3555.2,3600 3625,3600 ; 3555.2,3905 3682.6,3905 ; 3555.2,3955 3630,3955 3640,3965 ; 3555.2,4260 3687.6,4260 3705,4277.4 3705,4415 3685,4435 3630,4435 ; 3555.2,4310 3615,4310 3640,4325 ; 3630,3380 3680,3380 3710,3350 3710,3202.4 3697.6,3190 ; 3630,3730 3690,3730 3710,3710 3710,3547.4 3697.6,3535 ; 3630,4080 3690,4080 3710,4060 3710,3902.4 3697.6,3890 ; 3772.4,3190 3772.4,3535 3772.4,3890 3772.4,4250 ; 4600,3920 4810,3920 ; 4910,3920 5185,3920 5235,3970 5250,3970 ; 5165,3430 5285,3430 ; 5165,3750 5285,3750 ; 5165,4065 5290,4065 ; 5165,4385 5285,4385 ; 5290,3240 5370,3240 5395,3265 5395,3565 ; 5290,3565 5395,3565 ; 5290,3885 5390,3885 ; 5290,4195 5395,4195 ; 5395,4145 5395,4420 5445,4470 5445,4550 ; 5395,4180 5395,3565 ; 5480,3565 5590,3565 ; 5495,3885 5590,3885 5675,3885 ; 5585,3570 5590,3565 ; 5590,3240 5510,3240 5480,3270 5480,3550 5480,4165 5510,4195 5590,4195 5675,4195 ; 5595,3245 5675,3245 ; 5675,3195 5785,3195 ; 5675,3295 5673,3297 5618,3297 5585,3330 5585,3430 5675,3430 ; 5675,3515 5765,3515 ; 5675,3565 5590,3565 ; 5675,3615 5630,3615 5585,3660 5585,3750 5675,3750 ; 5675,3835 5780,3835 ; 5675,3935 5672,3938 5617,3938 5590,3965 5590,4065 5675,4065 ; 5675,4145 5775,4145 ; 5675,4245 5625,4245 5585,4285 5585,4385 5675,4385 ; 5900.2,3245 6027.6,3245 6037.6,3235 6037.6,3372.4 5980,3430 5975,3430 ; 5900.2,3295 5965,3295 ; 5900.2,3565 6032.6,3565 ; 5900.2,3615 5965,3615 5980,3630 ; 5900.2,3885 6037.6,3885 6037.6,4012.4 5985,4065 5975,4065 ; 5900.2,3935 5960,3935 5970,3945 ; 5900.2,4195 6037.6,4195 6037.6,4322.4 5975,4385 ; 5900.2,4245 5960,4245 5975,4260 ; 5975,3750 6020,3750 6037.6,3732.4 6037.6,3560 ; 6112.4,3235 6112.4,3560 6112.4,3885 ; 6225,3885 6112.4,3885 ; 6325,3885 6535,3885 ; 6525,4395 6525,4295 6525,4195 6112.4,4195 6112.4,3885 ; 7145,3125 7205,3125 7347.6,3125 ; 7205,3025 7410,3025 ; 7205,3225 7325,3225 7350,3250 7350,3360 7422.4,3432.4 7422.4,3475 ; 7347.6,3475 7347.6,3555 ; 7420,3292.4 7572.4,3292.4 7595,3315 7595,3365.2 7595,3725 7595,3807.4 7617.6,3830 ; 7422.4,3125 7420,3127.4 7420,3217.6 7527.4,3217.6 7545,3200 7545,3140 ; 7422.4,3555 7422.4,3475 ; 7425,2322.6 7422.4,2320 7422.4,2245 7422.4,2227.6 7495,2155 ; 7425,2397.4 7425,2510 7485,2570 7495,2570 ; 7495,1840 7595,1840 ; 7495,2885 7595,2885 ; 7517.6,2245 7517.6,2480 7522.6,2485 ; 7545,3365.2 7545,3455 7525,3475 7422.4,3475 ; 7595,1665 7595,1840 ; 7595,2155 7595,2332.6 ; 7595,2407.4 7595,2570 ; 7595,2977.6 7595,2885 ; 7595,3052.4 7595,3140 ; 7645,3140 7720,3140 ; 7685,2332.6 7695,2322.6 7695,2155 ; 7685,2407.4 7685,2560 7695,2570 ; 7692.4,3830 7845,3830 7845,3890 ; 7695,1840 7595,1840 ; 7695,2885 7595,2885 ; 7715,3025 7715,3135 7720,3140 ; 7725,3470 7725,3720 7720,3725 7840,3725 7845,3730 ; 7755,3220 7755,3325 7832.6,3325 7845,3337.4 7845,3530 7845,3630 7937.4,3630 7950,3642.6 ; 7832.6,3220 7832.6,3140 7720,3140 ; 7855,3010 7907.4,3062.4 7907.4,3140 7907.4,3325 7907.4,3392.4 7945,3430 ; 7910,2820 8010,2820 ; 7950,3717.4 7962.6,3730 8145,3730 ; 8060,2507.4 8060,2594.8 8060,2685 8110,2735 8110,2820 ; 8060,2820 8060,2897.6 ; 8062.6,2975 8062.6,3065 8060,3067.6 8060,3170 8060,3305 8060,3430 8060,3605 8085,3630 8145,3630 ; 8145,3830 8145,3910 ; 8180,1910 8189.3,1910 8280,1819.3 ; 8182.6,2177.4 8182.6,2270 8182.6,2350 8182.6,2510 8130,2510 8111.53,2528.47 8111.53,2593.28 8110,2594.8 8110,2655 8265,2810 8265,2955 ; 8280,2075 8280,2175
  Top Layer w32: 2800,3890 3155,3890 ; 3455,4335 3455,4555 ; 3772.4,3890 3910,3890 ; 4130,3890 3910,3890 ; 4130,4335 4130,4235 4130,4135 3945,4135 3910,4100 3910,3890 ; 5065,3430 5065,3750 ; 5065,4065 5065,4385 5065,4490 5125,4550 5345,4550 ; 5545,4550 5555,4560 5745,4560 5745,4465
  Bottom Layer w10: 700,1760 700,4155 2355,4155 2355,1760 700,1760
  Bottom Layer w14: 1425,2354.37 1425,2333.15 1451.08,2307.08 1465,2293.15 1465,2278.23 1462.4,2275.63
  Bottom Layer w18: 1202.4,2355 1203.03,2354.37 1387.6,2354.37 ; 1405,2087.6 1447.6,2087.6 1462.4,2102.4 1462.4,2275.63 1775.63,2275.63 1817.6,2317.6 1817.6,2505 ; 1460,2535 1462.4,2532.6 1462.4,2354.37
  Bottom Layer w20: 1127.4,2255.2 1127.6,2255 ; 1202.4,2255 1290,2255 1310.63,2275.63 1387.6,2275.63 ; 1405,2162.4 1425,2182.4 1425,2275.63
  Bottom Layer w24: 830,3212.6 907.4,3212.6 910,3210 ; 830,3287.4 830,3590 865,3625 1000,3625 ; 855,2635 1015,2635 ; 855,2835 1075,2835 ; 910,3435 1090,3435 1115,3410 1115,3325 ; 910,3535 912.4,3537.4 1815,3537.4 1817.6,3540 1975,3540 1990,3555 1990,3605.2 ; 1015,3325 1015,3310 1080,3245 1080,3115 1075,3110 1075,2937.6 1077.6,2935 ; 1015,3625 1000,3625 ; 1015,3765 1015,3640 1000,3625 ; 1052.6,2445 1052.6,2525 ; 1080,2840 1085,2835 1085,2615 1127.4,2572.6 1127.4,2525 1127.4,2445 ; 1127.4,2255.2 1127.4,2445 ; 1127.6,2255 1127.6,2192.4 1157.6,2162.4 1405,2162.4 ; 1155,2647.6 1460,2647.6 ; 1155,2722.4 1155,2932.4 1152.4,2935 1282.6,2935 ; 1170,3210 1175,3205 1175,3110 1292.6,3110 ; 1215,3625 1215,3765 1242.4,3792.4 1315,3792.4 ; 1315,3210 1315,3325 1315,3440 1350,3475 1725,3475 ; 1315,3625 1315,3717.6 ; 1325,2087.6 1405,2087.6 ; 1357.4,2935 1462.6,2935 ; 1360,2535 1360,2470 1335,2445 1127.4,2445 ; 1360,2835 1360,2932.4 ; 1367.4,3110 1515,3110 1515,3325 ; 1415,3325 1415,3390 1435,3410 1685,3410 1710,3385 1710,2995 1642.6,2927.6 1642.6,2835 ; 1415,3625 1415,3717.6 ; 1415,3792.4 1572.6,3792.4 1657.4,3707.6 1815,3707.6 1895,3707.6 1940,3662.6 1940,3605.2 ; 1460,2535 1460,2647.6 ; 1460,2835 1460,2722.4 1540,2722.4 ; 1500,1905 1500,2085 1525,2110 1890,2110 1990,2110 2090,2110 ; 1540,2647.6 1460,2647.6 ; 1560,2835 1642.6,2835 ; 1615,3110 1615,3325 ; 1640,2640 1642.6,2642.6 1642.6,2745 1642.6,2835 ; 1717.4,2835 1717.4,2745 1812.6,2745 ; 1815,3297.6 1815,2747.4 1812.6,2745 ; 1815,3372.4 1815,3462.6 1922.4,3462.6 1940,3445 1940,3380 ; 1815,3782.4 1895,3782.4 ; 1817.6,2505 1812.6,2510 1812.6,2745 ; 1890,2425 1890,2582.6 ; 1890,2657.4 1890,2820 ; 1890,3135 1990,3135 ; 1975,2592.6 1990,2577.6 1990,2425 ; 1975,2667.4 1985,2677.4 1985,2815 1990,2820 ; 1990,3222.6 1990,3135 ; 1990,3297.4 1990,3380 ; 2040,3380 2127.6,3380 ; 2052.4,2505 2052.4,2745 ; 2090,2425 2145,2425 2165,2445 2165,2592.6 ; 2090,2820 2145,2820 2165,2800 2165,2667.4 ; 2090,3135 1990,3135 ; 2125,3280 2127.6,3282.6 2127.6,3380 ; 2127.6,3460 2127.6,3380 ; 2242.4,2505 2242.4,2745 ; 3152.4,2090 3245,2090 ; 3152.4,2445 3245,2445 ; 3157.4,1735 3160,1732.4 3160,1430 3200,1390 3355,1390 ; 3170,1735 3245,1735 ; 3640,1620 3732.6,1620 ; 5250,2005 5480,2005 ; 5970,2030 6065,2030 6075,2040 ; 5975,1715 6067.6,1715 6077.6,1705 ; 5975,2670 6077.6,2670 ; 5980,2345 6077.6,2345 6082.6,2340
  Bottom Layer w32: 3147.4,2790 3245,2790 ; 3555,1390 3690,1390 3732.6,1432.6 3732.6,1620 ; 3640,1980 3737.6,1980 ; 3640,2330 3737.6,2330 ; 3640,2680 3737.6,2680 ; 5745,1510 6040,1510 6077.6,1547.6 6077.6,1705

## Polygon pours and split planes (outlines as drawn)
no net on Top Layer "Top Layer-No Net" (solid, remove dead copper, pour order 1001): 4455,3915 5130,3915 5135,3920 5145,3930 5145,4485 6055,4485 6060,4480 6070,4470 6070,3965 6680,3965 6680,4665 4455,4665 4465,4655 4465,3920
no net on Top Layer "Top Layer-No Net" (solid, remove dead copper, pour order 1000): 4455,3930 5105,3930 5105,3415 5105,3255 6120,3255 6125,3250 6154.76,3279.76 6154.76,3950.52 6674.48,3950.52 6680,3945 6680,3105 4460,3105 4455,3110 4455,3920
no net on Top Layer "Top Layer-No Net" (solid, remove dead copper, pour order 1000): 2650,4640 2650,3050 4275,3050 4275,4640 2650,4640
no net on Bottom Layer "Top Layer-No Net" (solid, remove dead copper, pour order 1000): 2355,1760 700,1760 700,4155 2355,4155 2355,1760
no net on Bottom Layer "Top Layer-No Net" (solid, remove dead copper, pour order 1002): 4455,1310 4455,2870 6680,2870 6680,1310 4450,1310 4445,1315
no net on Bottom Layer "Top Layer-No Net" (solid, remove dead copper, pour order 1001): 2650,1305 2650,2895 4275,2895 4275,1305 2650,1305

## Other copper
Top Layer:
  region: 8460,3505 8460,3755 8260,3755 8260,3505
  region: 7645,3450 7645,3860 7580,3860 7580,3450
  region: 7907.4,2460 7907.4,3065 7770,3065 7770,2460
  region: 7970,2460 7970,2820 7840,2820 7840,2460
  region: 7880,1545 7880,2495 7755,2495 7755,1545
  region: 7795,1545 7795,1785 7675,1785 7675,1545
  region: 7520,1545 7520,1780 7275,1780 7275,1545
  region: 7360,1720 7360,2965 7100,2965 7100,1720
  region: 7155,2945 7155,3755 7100,3755 7100,2945
  region: 7305,3280 7305,3755 7145,3755 7145,3280
  region: 7355,3445 7355,3585 7280,3585 7280,3445
  region: 7510,3630 7510,3925 7280,3925 7280,3630
  region: 8265,3880 8265,3925 7500,3925 7500,3880
  region: 8460,3030 8460,3560 8150,3560 8150,3030
  region: 8290,3540 8290,3925 8215,3925 8215,3540
  region: 8460,1735 8460,3030 8325,3030 8325,1735
  region: 8350,2235 8350,2540 8255,2540 8255,2235
  region: 8270,1550 8270,1685 7875,1685 7875,1550
  region: 8340,1735 8340,1865 8230,1865 8230,1735
  region: 8270,1635 8270,1865 8225,1865 8225,1635
  rectangle: 4980,3300 5065,3835
  rectangle: 5480,3145 5835,3190
  rectangle: 6355,3975 6645,4090
  rectangle: 5843.38,4490 5940,4625.16
  rectangle: 5020,4500 5360,4630
  rectangle: 4995,3980 5070,4565
  rectangle: 4490,4020 4765,4130
  rectangle: 4635,3725 4770,3815
  rectangle: 6370,3695 6645,3780
  rectangle: 5215,3930 5285,4015
  rectangle: 5450,3930 5510,4010
  rectangle: 5715,4445 5780,4550
  rectangle: 5950,3280 6000,3360
  rectangle: 5955,3600 6005,3680
  rectangle: 5945,3915 5995,3995
  rectangle: 5950,4230 6000,4310
  rectangle: 5745,3180 5830,4315
  rectangle: 5660,4605 5855,4629.7
  rectangle: 2685,3990 2965,4105
  rectangle: 2685,3700 2975,3785
  rectangle: 3970,3690 4240,3790
  rectangle: 3975,3990 4240,4070
  rectangle: 3395,3095 3490,3145
  rectangle: 3175,3085 3525,3110
  rectangle: 3395,3135 3490,4385
  pour cut-out: 3145,4445 3145,3220 3772.4,3220 3785,3232.6 3785,4440 3150,4440
  text "THS3001" at 4585,3320 h120 r90
  text "单电源" at 4700,3320 h100 r90
  text "THS3001" at 2750,3270 h100 r90
  text "双电源" at 2860,3270 h100 r90
  text "SCL" at 7980,1715 h70 r90
  text "SDA" at 8080,1715 h70 r90
  text "GND" at 8180,1715 h68 r90
Bottom Layer:
  region: 1600,2905 1600,3015 1530,3015 1530,2905
  region: 1695,1795 1695,2067.64 1604.99,2067.64 1604.99,1795
  region: 1420,1795 1420,2090 1250,2090 1250,1795
  region: 2290,3295 2290,3545 2197.4,3545 2197.4,3295
  region: 1975,3785 1975,3865 1720,3865 1720,3785
  region: 1095,3865 1095,3960 905,3960 905,3865
  region: 950,2710 950,2760 775,2760 775,2710
  region: 960,2912.4 960,2995 880,2995 880,2912.4
  region: 2310,2440 2310,2820 2235,2820 2235,2440
  region: 1861.65,2872.88 1861.65,3080 1760,3080 1760,2872.88
  region: 1817.6,2355 1817.6,2915 1710,2915 1710,2355
  region: 1940,2210 1940,2365 1505,2365 1505,2210
  rectangle: 5840,1345 5985,1460
  rectangle: 4985,1490 5070,1979.81
  rectangle: 4985,2135 5070,2645
  rectangle: 6155,2250 6345,2775
  rectangle: 6155,1625 6290.11,2010
  rectangle: 5715,1395 5780,1520
  rectangle: 6160,1675 6230,2035
  rectangle: 6170,2310 6225,2705
  rectangle: 6055,1675 6100,2700
  rectangle: 3800,1545 3880,1630
  rectangle: 3810,2000 3880,2055
  rectangle: 3015,1665 3087.6,1735.01
  rectangle: 3015,2100 3080,2160
  rectangle: 3005,2380 3080,2445
  rectangle: 3075,2840 3310,2860
  rectangle: 3005,2810 3080,2860
  rectangle: 3015,1705 3075,2120
  rectangle: 3005,2415 3070,2820
  rectangle: 3135,1705 3180,2820
  rectangle: 3825,2300 3875,2710
  rectangle: 3825,1590 3880,2010
  rectangle: 3705,1590 3760,2705
  pour cut-out: 5145,1490 5145,2715 5140,2720 6080,2720 6080,1480 6070,1490
  pour cut-out: 3145,1505 3145,2725 3785,2725 3785,1505
  text "AD637 RMS-DC" at 1835,4100 h100 r180